# Altium PCB tof.PcbDoc
Units mil, origin at the board's own origin, x right, y up, seen from the top; angles counter-clockwise.
Board outline 6000 x 4000 mil, 2 copper layers (Top Layer, Bottom Layer); 7 components, 6 nets, 24 pads, 0 vias.
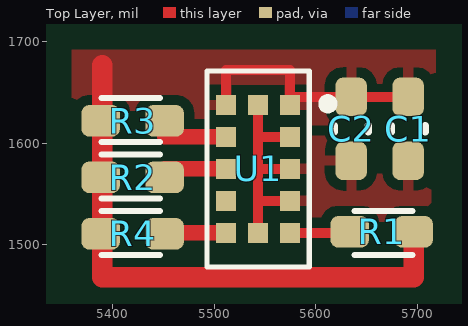
[diagram p0: Top Layer view]
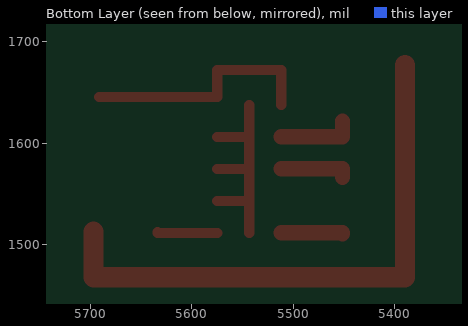
[diagram p1: Bottom Layer view, seen from below]
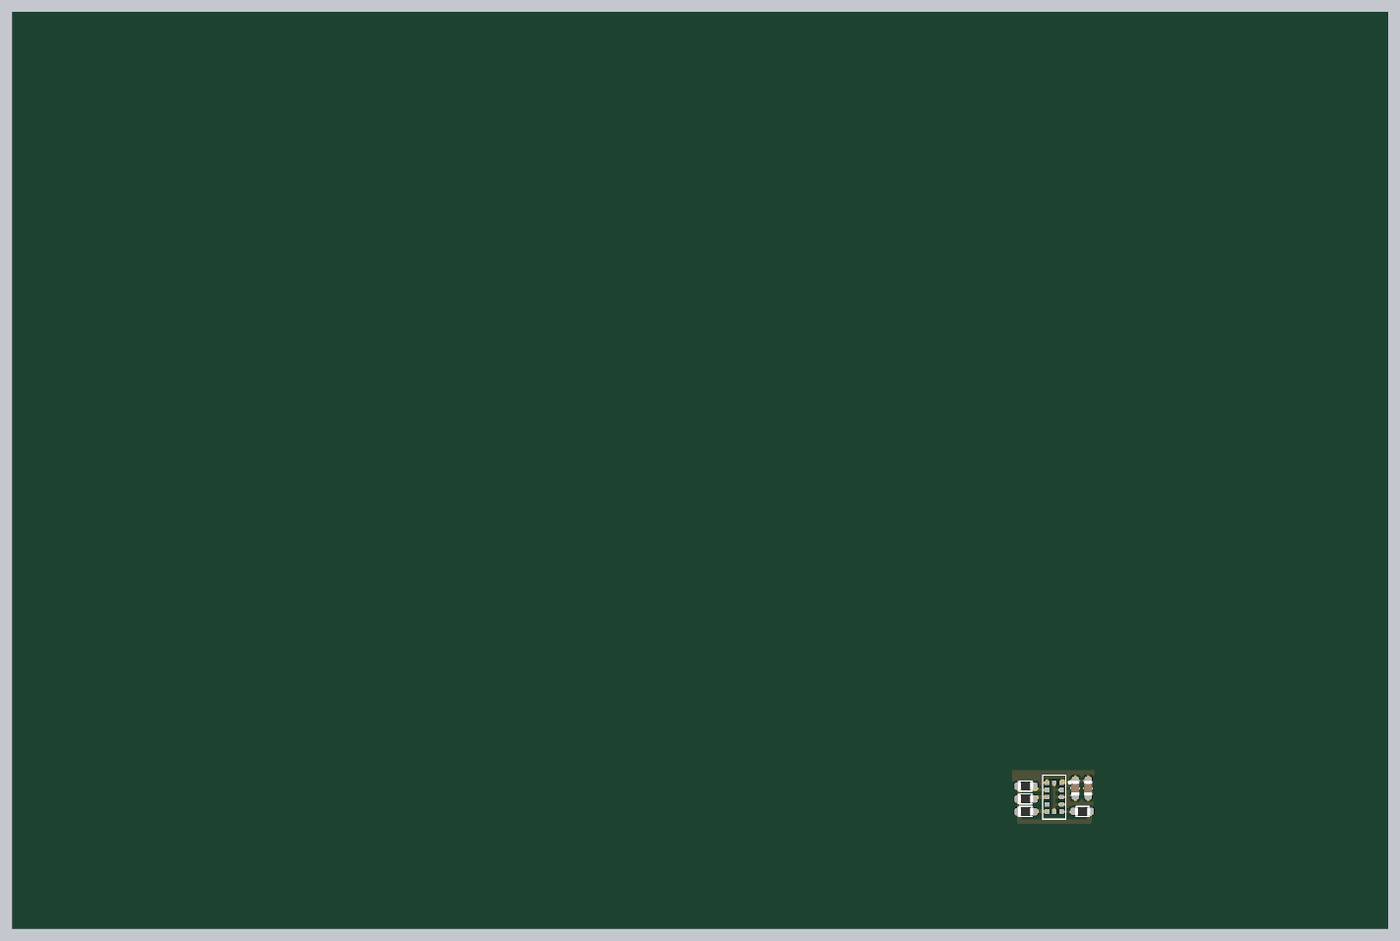
[diagram p2: 3D render of the assembled board from above, using the file's embedded part models]

## Layer stack, top to bottom
Top Solder: solder mask 0.4, Solder Resist, Dk 3.5
Top Layer: signal copper 1.4
Dielectric 1: dielectric 12.6, FR-4, Dk 4.8
Bottom Layer: signal copper 1.4
Bottom Solder: solder mask 0.4, Solder Resist, Dk 3.5

## Board outline
1000,1000 7000,1000 7000,5000 1000,5000

## Design rules (kind name [scope] priority, off if disabled: settings)
Clearance [All] p1: gap=10 ignorepadtopadclearanceinfootprint=FALSE except(0: Arc-Hole Track-Hole SMDPad-Hole THPad-Hole Via-Hole Fill-Hole Poly-Hole Region-Hole Text-Hole)
PolygonConnect [All] p1: connectstyle=Relief reliefconductorwidth=10 reliefentries=4 polygonreliefangle="90 Angle" airgapwidth=10
RoutingVias [All] p1: holewidth=28 width=50 viastyle="Through Hole" minholewidth=28 minwidth=50 maxholewidth=28 maxwidth=50
SolderMaskExpansion [All] p1: expansion=4
Width [All] p1: maxlimit=500 minlimit=5 preferedwidth=10
30 further rules are at their usual default settings.

## Components (designator, comment, footprint, x,y, rotation, side; value= is the part's Value field where it differs from the comment)
C1 "100nF 25V" RC_0603 5691.09,1614.17 r90 top value="CAP CER 0.1UF 25V X7R 0603"
C2 "100nF 25V" RC_0603 5634.92,1614.17 r90 top value="CAP CER 0.1UF 25V X7R 0603"
R1 "1k" rr_0603 5667,1511.81 r0 top value="RES SMD 1K OHM 1% 1/16W 0402"
R2 "1k" rr_0603 5418,1567.41 r180 top value="RES SMD 1K OHM 1% 1/16W 0402"
R3 "1k" rr_0603 5418,1623 r180 top value="RES SMD 1K OHM 1% 1/16W 0402"
R4 "1k" rr_0603 5418,1511.81 r180 top value="RES SMD 1K OHM 1% 1/16W 0402"
U1 "VL53L1CXV0FY/1" *SENSOR_VL53L1CXV0FY/1 5543.31,1574.8 r0 top

## Footprints (in the part's own frame and the unit in brackets; to place one, negate y for a bottom-side part, rotate by r counter-clockwise, add the part's x,y. Pads: shape width x height; smd on the part's side, far side on the other; paste and mask are expansions set on the pad)
*SENSOR_VL53L1CXV0FY/1 [mm]
  rect 0.5x0.5 smd: 1(0.8,1.6) 2(0.8,0.8) 3(0.8,0) 4(0.8,-0.8) 5(0.8,-1.6) 6(0,-1.6) 7(-0.8,-1.6) 8(-0.8,-0.8) 9(-0.8,0) 10(-0.8,0.8) 11(-0.8,1.6) 12(0,1.6)
  silkscreen extent -1.28,-2.45 1.87,2.45
RC_0603 [mil] "Chip Capacitor"
  rrect50% 38x31 smd: 1(-31.5,0) 2(31.5,0)
  silkscreen extent -3,-17 3,17, body extent -33,-18 33,18, height 35
rr_0603 [mil]
  rrect50% 38x31 smd: 1(-33.47,0.98) 2(29.53,0.98)
  silkscreen extent -29,-22 29,22, body extent -33,-18 33,18, height 22

## Part data
C1 C2: library part CAP-0603-104-25V, "CAPACITOR CHIP", Manufacturer=KEMET, Package=0603, Cost=0,07, Order Number=C0603C104M4RACTU
R1 R2 R3 R4: library part Res1, "Resistor", Manufacturer=Yageo, Package=0402, Cost=0,1, Order Number=RC0402FR-071KL
U1: "Optical Sensor 157.480 _4m_ I²C Output", Package="LGA-12 STMicroelectronics", Availability=Unavailable, MF=STMicroelectronics, MP=VL53L1CXV0FY/1, Price=None, SnapEDA_Link=https://www.snapeda.com/parts/VL53L1CXV0FY/1/STMicroelectronics/view-part/2755611/?ref=snap

## Nets (pads, with @x,y where several pads share a name; then routed paths per layer and width w, separated by ;. In a path a pad name is that pad's centre, name@x,y a point inside that pad or via, vN(x,y) a via of type N, cw(c..) or ccw(c..) an arc to the next point about the centre after c; other vN are vias at no path point)
GND: C1.1 C2.1 U1.2 U1.3 U1.4 U1.6 U1.12 | length 220.5
  Top Layer w10: U1.6 5543.31,1543.31 ; U1.12 5543.31,1606.3 ; U1.4 5543.31,1543.31 ; U1.3 5543.31,1574.8 ; U1.2 5543.31,1606.3 ; 5543.31,1543.31 5543.31,1574.8 ; 5543.31,1574.8 5543.31,1606.3
NetR1_1: R1.1 U1.5 | length 59.7
  Top Layer w10: U1.5 5633.53,1511.81 R1.1
NetR2_1: R2.1 U1.9 | length 68.7
  Top Layer w15: R2.1 5451.47,1574.8 U1.9
NetR3_1: R3.1 U1.10 | length 76.1
  Top Layer w15: R3.1 5451.47,1606.3 U1.10
NetR4_1: R4.1 U1.7 | length 61.3
  Top Layer w15: R4.1 5451.47,1511.81 U1.7
VCC: C1.2 C2.2 R1.2 R2.2 R3.2 R4.2 U1.1 U1.11 | length 800.1
  Top Layer w10: U1.11 5511.81,1672 5574.8,1672 5574.8,1645.67 C2.2 C1.2
  Top Layer w20: 5390,1677 5390,1468 5696.53,1468 R1.2
pads on no net: U1.8

## Polygon pours and split planes (outlines as drawn)
VCC on Top Layer "Top Layer-VCC" (solid, remove dead copper, pour order 0): 5718,1617.7 5718,1692 5360,1692 5360,1617.7
GND on Top Layer "Top Layer-GND" (solid, pour order 1): 5360,1692.91 5714,1692.91 5714,1456.69 5360,1456.69